# Altium PCB JUNORPCDC.PcbDoc (part 2 of 4)
Units mil, origin at the board's own origin, x right, y up, seen from the top; angles counter-clockwise.
Board outline 12224.75 x 6712.94 mil, 12 copper layers (Top Layer, Internal Plane 1, Signal Layer 1, Internal Plane 2, Internal Plane 3, Signal Layer 2, Internal Plane 4, Signal Layer 3, Internal Plane 5, Signal Layer 4, Internal Plane 6, Bottom Layer), stack 101.97 mil thick; 156 components, 400 nets, 1963 pads, 846 vias.
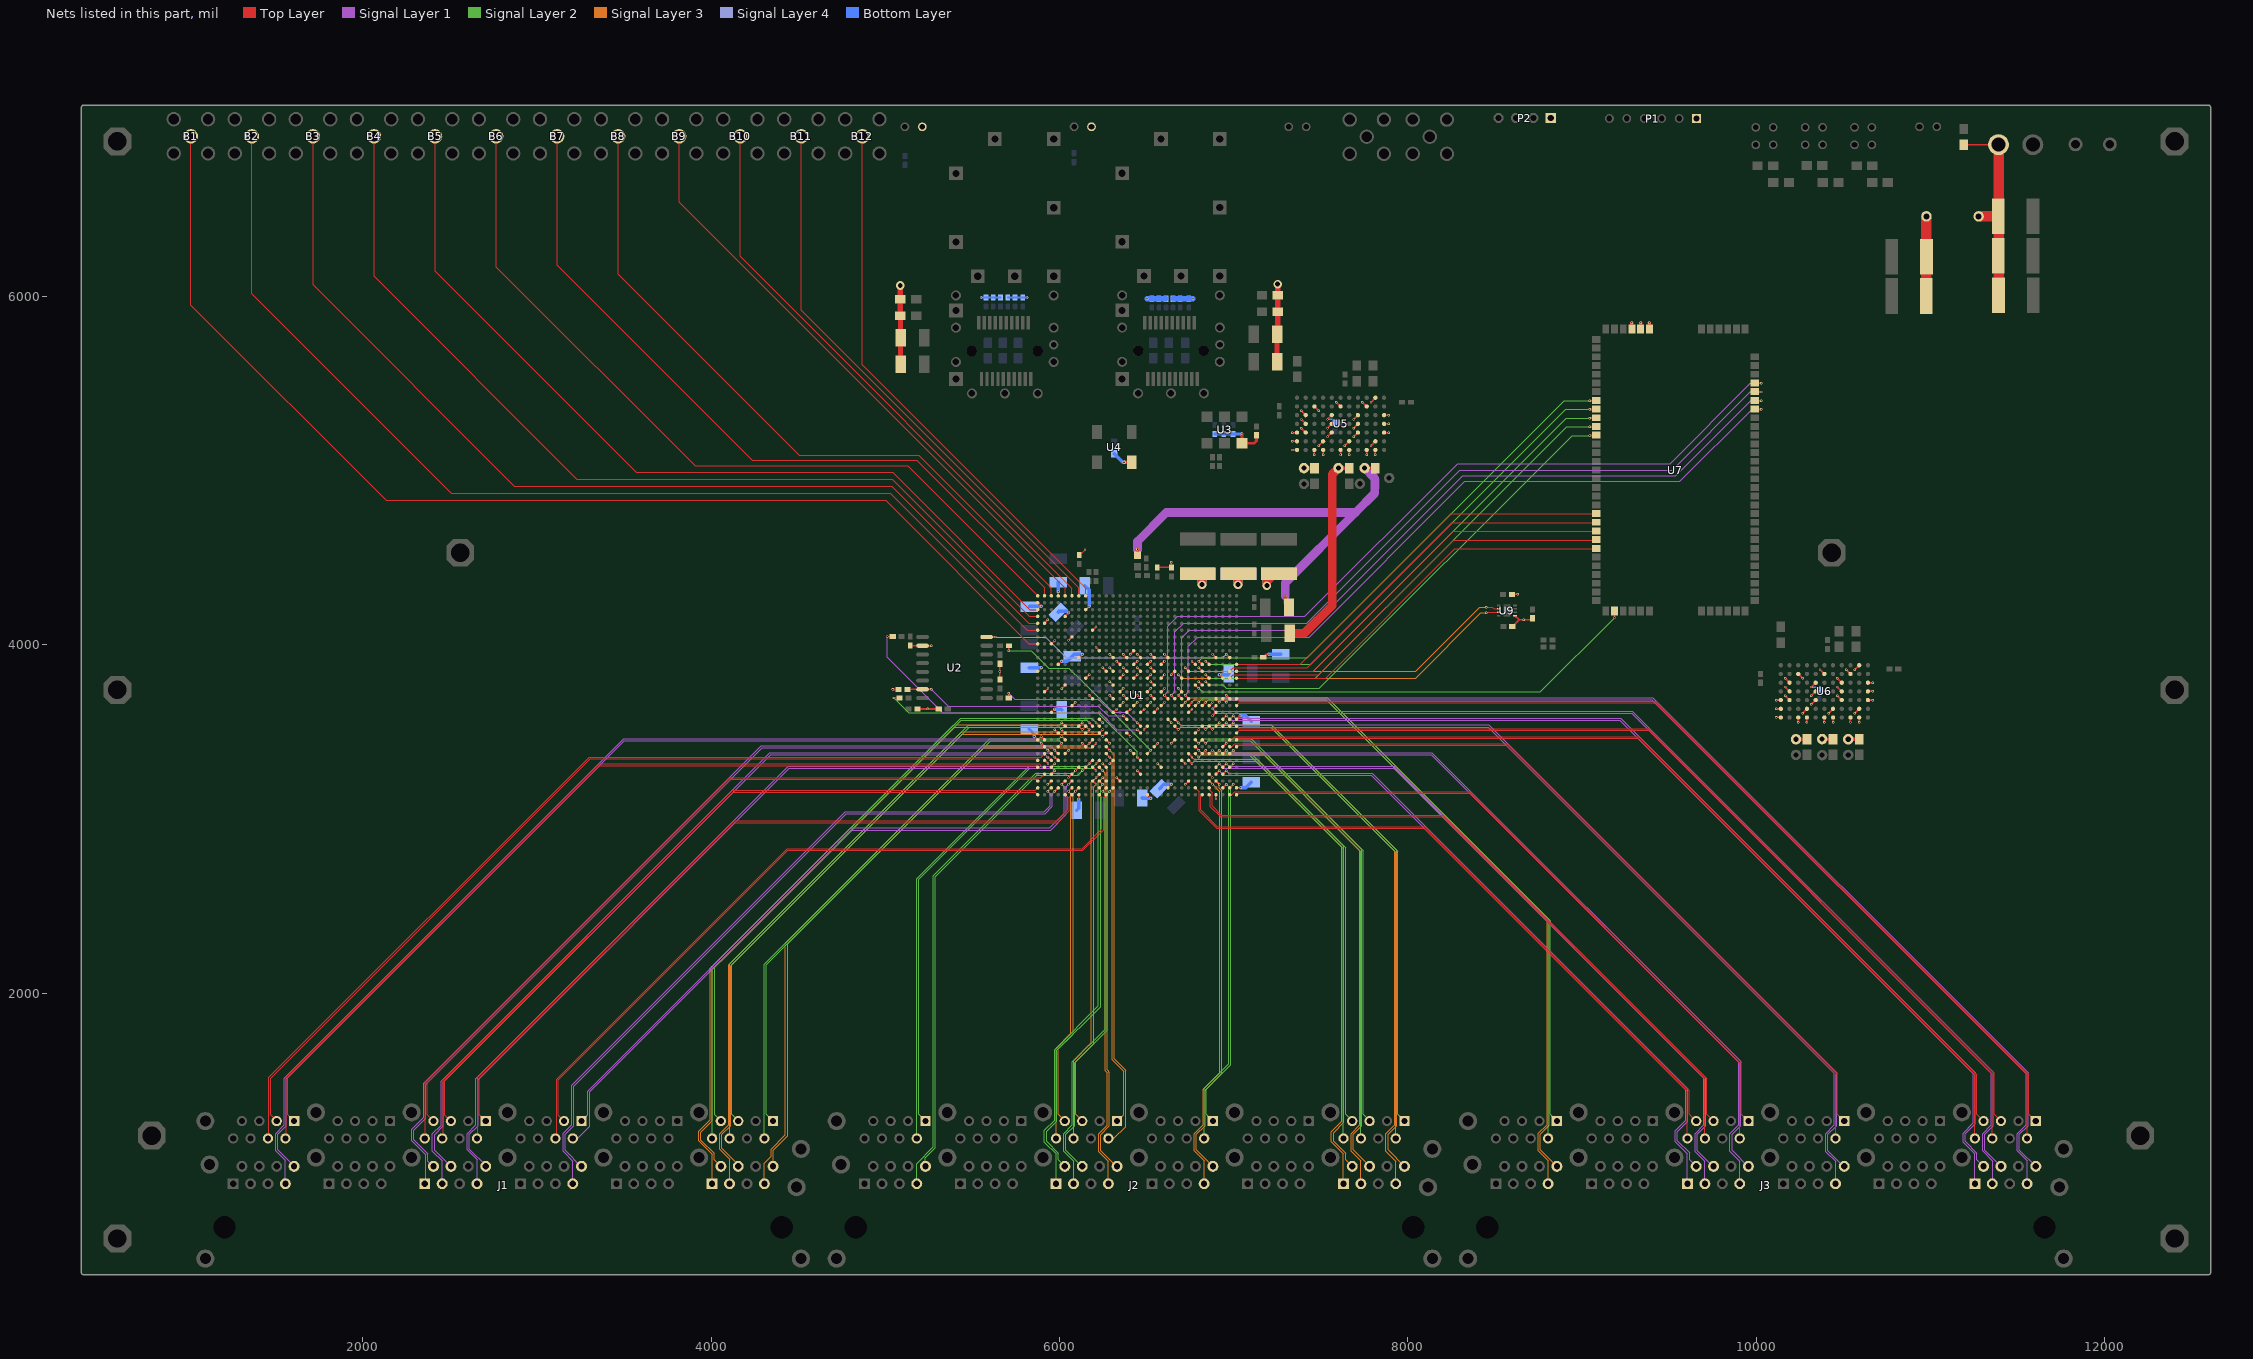
[diagram p12: the nets of this part, all layers, seen from the top]

## Via types
v1: diameter 14, hole 8, Top Layer to Bottom Layer, 811 vias
v2: diameter 50, hole 28, Top Layer to Bottom Layer, 26 vias
v3: diameter 20, hole 10, Top Layer to Bottom Layer, 9 vias

## Nets (pads, with @x,y where several pads share a name; then routed paths per layer and width w, separated by ;. In a path a pad name is that pad's centre, name@x,y a point inside that pad or via, vN(x,y) a via of type N, cw(c..) or ccw(c..) an arc to the next point about the centre after c; other vN are vias at no path point)
+1.0Vfpga: C21.2 C22.2 C23.2 C24.2 C25.2 C26.2 C49.2 pad.4 U1.M11 U1.M13 U1.M15 U1.M17 U1.N10 U1.N12 U1.N14 U1.N16 U1.N18 U1.P11 U1.P17 U1.R10 U1.R12 U1.R16 U1.R18 U1.T11 U1.T17 U1.U10 U1.U12 U1.U16 U1.U18 U1.V17 U1.W16 U1.W18 U5.A1 U5.A2 U5.A3 U5.C1 U5.D1 U5.D2 | length 1393.5
  Top Layer w8: v1(6287.6,3710) 6307.27,3690.33 U1.W16@6307.27,3689.93 ; U1.W18@6307.27,3611.19 6307.71,3611.19 v1(6327,3630.48) ; U1.V17@6346.64,3650.56 6366,3669.92 v1(6366,3670) ; v1(6366,3709) 6366.94,3709 U1.U16@6386.01,3689.93 ; v1(6366,3867) 6385.59,3847.41 U1.U12@6386.01,3847.41 ; v1(6366,3946) 6366.16,3946 U1.U10@6386.01,3926.15 ; U1.U18@6386.01,3611.19 6386.71,3611.19 v1(6406,3630.48) ; U1.T17@6425.38,3650.56 6425.76,3650.56 v1(6445.2,3670) ; U1.T11@6425.38,3886.78 6425.98,3886.78 v1(6445.2,3906) ; v1(6445,3867) 6445.16,3867 U1.R12@6464.75,3847.41 ; v1(6445.24,3709) 6445.68,3709 U1.R16@6464.75,3689.93 ; v1(6445.41,3946) 6464.75,3926.66 U1.R10@6464.75,3926.15 ; U1.R18@6464.75,3611.19 6465.71,3611.19 v1(6485,3630.48) ; U1.P17@6504.12,3650.56 6504.43,3650.56 v1(6523.87,3670) ; U1.P11@6504.12,3886.78 6504.78,3886.78 v1(6524,3906) ; v1(6523.87,3788) 6543.2,3768.67 U1.N14@6543.49,3768.67 U1.N14@6543.67,3768.67 ; v1(6523.87,3867) U1.N12@6543.49,3847.41 ; v1(6524.09,3709) 6524.42,3709 U1.N16@6543.49,3689.93 ; v1(6524.35,3945) 6524.64,3945 U1.N10@6543.49,3926.15 ; U1.N18@6543.49,3611.19 6543.49,3611.49 v1(6563,3631) ; U1.M17@6582.86,3650.56 6583.02,3650.56 v1(6602.46,3670) ; U1.M15@6582.86,3729.3 6602.46,3748.9 v1(6602.46,3749) ; U1.M13@6582.86,3808.04 6602,3827.18 v1(6602,3828) ; U1.M11@6582.86,3886.78 6602,3905.92 v1(6602,3906) ; v1(7336,5118) U5.A1@7363,5118 ; v1(7336,5168) U5.A2@7363,5168 ; v1(7336,5218) U5.A3@7363,5218 ; v1(7463,5091) U5.C1@7463,5118 ; v1(7488,5143) U5.D2@7513,5168 ; v1(7513,5091) U5.D1@7513,5118
  Top Layer w20: pad.4@7403,5014 C49.2@7464,5014
  Top Layer w50: C21.2@6794,4407.59 6817,4384.59 v2(6817,4345) ; v2(7024.22,4345) 7024.22,4403.81 C22.2@7027,4406.59 ; v2(7190,4339) 7190,4363 7233.59,4406.59 C23.2@7260,4406.59
  Bottom Layer w50: C26.2@6794,4407.59 6817,4384.59 v2(6817,4345) ; v2(7024.22,4345) 7024.22,4403.81 C25.2@7027,4406.59 ; v2(7190,4339) 7190,4366 7230.59,4406.59 C24.2@7260,4406.59
+1.0Vmgt: C55.2 L4.1 pad.6 U5.F1 U5.G1 U5.G2 | length 1264.4
  Top Layer w8: v1(7613,5091) U5.F1@7613,5118 ; v1(7638,5143) U5.G2@7663,5168 ; v1(7663,5091) U5.G1@7663,5118
  Top Layer w20: pad.6@7601,5014 C55.2@7663,5014
  Top Layer w50: L4.1@7322,4065.41 7405.41,4065.41 7565,4225 7565,4978 pad.6@7601,5014
+1.2Vmgt: C59.2 L1.2 L7.1 pad.8 U5.J1 U5.K1 U5.K2 | length 2596.2
  Top Layer w8: v1(7763,5091) U5.J1@7763,5118 ; v1(7788,5143) U5.K2@7813,5168 ; v1(7813,5091) U5.K1@7813,5118
  Top Layer w20: L1.2@6447,4513.46 v1(6447,4547) ; v1(7296,4279.55) 7296,4236.52 L7.1@7317,4215.52 ; pad.8@7751,5014 C59.2@7813,5014
  Signal Layer 1 w50: v1(6447,4547) 6447,4593 6613,4759 7699,4759 ; v1(7296,4279.55) 7296,4356 7699,4759 ; pad.8@7751,5014 7810,4955 7810,4870 7699,4759
+1.8Vd: C27.2 C28.2 C29.2 C30.2 C31.2 C32.2 C56.2 L5.1 pad.12 U1.AA9 U1.AA19 U1.AB16 U1.AC3 U1.AC13 U1.AD10 U1.AE7 U1.AE17 U1.AF4 U1.AF14 U1.AG1 U1.AG11 U1.AH8 U1.AH18 U1.AJ5 U1.AJ15 U1.AK2 U1.AK12 U1.P13 U1.P15 U1.T13 U1.V11 U1.V13 U1.V15 U1.W10 U1.W12 U1.W14 U1.Y12 U6.F1 U6.G1 U6.G2 | length 1490.9
  Top Layer w8: U1.AK12@5874.2,3847.41 5874.2,3847.6 v1(5893.6,3867) ; U1.AK2@5874.2,4241.11 5893.6,4221.71 v1(5893.6,4221) ; U1.AJ15@5913.57,3729.3 5913.75,3729.3 v1(5933.45,3749) ; U1.AJ5@5913.57,4123 5933,4142.43 v1(5933,4143) ; U1.AH18@5952.94,3611.19 5952.94,3611.42 v1(5972,3630.48) ; U1.AH8@5952.94,4004.89 5953.34,4004.89 v1(5972.45,4024) ; U1.AG11@5992.31,3886.78 6011.53,3906 v1(6011.69,3906) ; U1.AG1@5992.31,4280.48 v1(5992.31,4305) ; v1(6011.53,3748) 6031.68,3768.15 U1.AF14@6031.68,3768.67 U1.AF14@6032.31,3768.67 ; U1.AF4@6031.68,4162.37 6051,4181.69 v1(6051,4182) ; v1(6051,4025) 6051.79,4025 U1.AE7@6071.05,4044.26 ; U1.AE17@6071.05,3650.56 6071.31,3650.56 v1(6090.76,3670) ; U1.AD10@6110.42,3926.15 6111.54,3926.15 v1(6130.39,3945) ; U1.AC13@6149.79,3808.04 6169.61,3827.86 v1(6169.61,3828) ; U1.AC3@6149.79,4201.74 v1(6169,4221) ; v1(6169,3710) 6169.09,3710 U1.AB16@6189.16,3689.93 ; v1(6209,3985) U1.AA9@6228.53,3965.52 ; U1.AA19@6228.53,3571.82 6248,3552.35 v1(6248,3551.74) ; v1(6248.39,3867) 6267.9,3847.49 U1.Y12@6267.9,3847.41 ; v1(6287.41,3867) 6287.68,3867 U1.W12@6307.27,3847.41 ; v1(6287.6,3788) 6287.94,3788 U1.W14@6307.27,3768.67 U1.W14@6307.67,3768.67 ; v1(6287.78,3946) 6287.78,3945.64 U1.W10@6307.27,3926.15 ; v1(6327,3906) 6327.42,3906 U1.V11@6346.64,3886.78 ; U1.V15@6346.64,3729.3 6346.64,3729.64 v1(6366,3749) ; U1.V13@6346.64,3808.04 6346.64,3808.64 v1(6366,3828) ; U1.T13@6425.38,3808.04 6445,3827.66 v1(6445,3828) ; U1.P13@6504.12,3808.04 6524,3827.92 v1(6524,3828) ; U1.P15@6504.17,3729.3 v1(6523.87,3749) ; v1(10391,3555) U6.F1@10391,3582 ; v1(10416,3607) U6.G2@10441,3632 ; v1(10441,3555) U6.G1@10441,3582
  Top Layer w20: pad.12@10378,3458 10379,3457 C56.2@10441,3457
  Bottom Layer w20: C31.2@5826,3868 5827,3867 v1(5893.6,3867) ; C28.2@5826,4219 5828,4221 v1(5893.6,4221) ; v1(5972,3630.48) 6009.52,3630.48 C29.2@6013,3627 ; C32.2@5992,4187 5996,4191 6042,4191 v1(6051,4182) ; C27.2@5992,4359 5992.31,4358.69 v1(5992.31,4305) ; v1(6011.69,3906) 6045,3906 C30.2@6073,3934 6084,3945 v1(6130.39,3945) ; L5.1@6145,4339 6169,4315 v1(6169,4221)
+2.5Vd: C2.2 C3.2 C4.2 C37.2 C38.2 C39.2 C40.2 C60.2 pad.14 R16.2 U1.A19 U1.A29 U1.AA29 U1.AB26 U1.AC23 U1.AD20 U1.AD30 U1.AE27 U1.AF24 U1.AG21 U1.AH28 U1.AJ25 U1.AK22 U1.B16 U1.B26 U1.C23 U1.D20 U1.D30 U1.E17 U1.E27 U1.F24 U1.G21 U1.H18 U1.H28 U1.L19 U1.Y22 U3.6 U6.J1 U6.K1 U6.K2 | length 1476.4
  Top Layer w8: v1@5855,3472.91 U1.AK22@5874.2,3453.71 ; U1.AJ25@5913.57,3335.6 v1(5933.45,3315.72) ; v1@5933.45,3198 U1.AH28@5952.94,3217.49 ; v1(5972,3512) 5990.92,3493.08 U1.AG21@5992.31,3493.08 ; v1@6051.06,3236.87 U1.AE27@6071.05,3256.86 ; v1(6110.42,3114) U1.AD30@6110.42,3138.75 ; U1.AD20@6110.42,3532.45 6110.47,3532.45 v1(6130,3551.98) ; v1(6130,3434) U1.AC23@6149.66,3414.34 ; U1.AB26@6189.16,3296.23 v1@6209,3276.39 ; v1(6209,3157.76) U1.AA29@6228.53,3177.28 ; U1.Y22@6267.9,3453.71 v1@6287.15,3434.46 ; U1.L19@6622.23,3571.82 6622.23,3571.51 v1(6642,3551.74) ; v1(6721,3197.93) U1.H28@6740.34,3217.27 ; U1.H18@6740.34,3611.19 6759.63,3630.48 v1(6760,3630.48) ; U1.G21@6779.71,3493.08 6799,3512.37 v1(6799,3513) ; U1.F24@6819.97,3374.97 v1(6839,3394) ; U1.E17@6858.45,3650.56 6877.89,3670 v1(6878,3670) ; v1(6897.82,3114) U1.D30@6897.82,3138.75 ; U1.D20@6897.82,3532.45 6897.82,3532.82 v1(6917,3552) ; U1.C23@6937.34,3414.34 v1(6957,3434) ; v1(6956.74,3710) 6956.74,3709.75 U1.B16@6976.56,3689.93 ; U1.B26@6976.56,3296.23 v1@6996.26,3315.93 ; U1.A29@7015.93,3178.12 v1(7040,3178.12) ; U1.A19@7015.93,3571.82 7015.93,3571.93 v1(7036,3592) ; v1(10541,3555) U6.J1@10541,3582 ; v1(10566,3607) U6.K2@10591,3632 ; v1(10591,3555) U6.K1@10591,3582
  Top Layer w10: v1@5855,3472.91 v1(5855,3473) ; v1(5933,3198) v1@5933.45,3198 ; U1.AF24@6031.68,3374.97 6051.56,3394.85 v1(6051.56,3395) ; v1(6051,3236.87) v1@6051.06,3236.87 ; U1.AC23@6149.66,3414.34 U1.AC23@6149.79,3414.34 ; v1(6209,3276) v1@6209,3276.39 ; U1.AA29@6228.53,3177.28 U1.AA29@6228.53,3178.12 ; v1(6287.15,3433.52) v1@6287.15,3434.46 ; U1.H28@6740.34,3217.27 U1.H28@6740.34,3217.49 ; U1.F24@6819.08,3374.97 U1.F24@6819.97,3374.97 ; U1.E27@6858.45,3256.86 6878,3237.31 v1(6878,3236.5) ; U1.C23@6937.19,3414.34 U1.C23@6937.34,3414.34 ; v1@6996.26,3315.93 v1(6996.26,3316)
  Top Layer w16: v1(7047,5210.41) U3.6@7047,5156 7116,5156 7131,5171 R16.2@7131,5202.41
  Top Layer w20: pad.14@10528,3457 C60.2@10591,3457
  Bottom Layer w16: C2.2@6891,5210.41 C3.2@6943,5210.41 C4.2@6996,5210.41 v1(7047,5210.41)
  Bottom Layer w20: C38.2@5826,3514 5855,3485 v1(5855,3473) ; C37.2@6099,3049 6110.42,3060.42 v1(6110.42,3114) ; v1(7036,3592) 7069,3592 C39.2@7100,3561 ; v1(7040,3178.12) 7068.12,3178.12 C40.2@7101,3211
+3.3Vd: C1.2 C9.2 C11.2 C16.2 C19.2 C33.2 C34.2 C35.2 C36.2 C41.2 C50.2 C70.1 L2.2 L3.1 L6.2 L8.1 LED2.1 LED3.1 P1.1 P2.1 pad.10 R1.2 R2.2 R3.2 R6.2 R7.2 R8.2 R9.2 R10.2 R11.2 R22.1 R23.1 R24.1 R25.1 R26.1 R27.1 R29.1 R30.1 R31.1 R32.1 R33.1 R34.1 R56.1 R57.1 U1.AB6 U1.C13 U1.D10 U1.F14 U1.G11 U1.J15 U1.J25 U1.K12 U1.K22 U1.L10 U1.L29 U1.M26 U1.N23 U1.P20 U1.P30 U1.R27 U1.T9 U1.T24 U1.U21 U1.V28 U1.W25 U2.2 U4.4 U6.A1 U6.A2 U6.A3 U6.C1 U6.D1 U6.D2 U7.C8 U7.C9 U7.C10 U9.5 | length 3407.5
  Top Layer w8: R9.2@5143,3995.41 5144.41,3994 U2.2@5213.13,3994 v1(5264,3994) ; U1.AB6@6189.16,4083.63 6189.63,4083.63 v1(6209,4103) ; v1@6287.6,3315.93 U1.W25@6307.27,3335.6 ; v1(6327,3237) U1.V28@6346.51,3217.49 ; U1.U21@6386.01,3493.08 6406,3473.09 v1(6406,3472.91) ; v1(6406,3946) 6425.38,3965.38 U1.T9@6425.38,3965.52 ; v1@6406.35,3394 U1.T24@6425.38,3374.97 ; v1@6445.61,3276 U1.R27@6464.75,3256.86 ; v1(6484.57,3512.26) 6504.12,3531.81 U1.P20@6504.12,3532.45 ; U1.P30@6504.12,3138.75 v1@6523.87,3119 ; U1.N23@6543.49,3414.34 v1@6563,3433.85 ; R3.2@6561.14,4443.59 R1.2@6642,4443.59 v1(6642,4474) ; v1(6563,3316) U1.M26@6582.77,3296.23 ; v1(6602,3946) 6602.38,3946 U1.L10@6622.23,3926.15 ; v1(6642,3433.85) U1.K22@6661.6,3453.45 ; v1(6642,3828) 6661.41,3847.41 U1.K12@6661.6,3847.41 ; v1(6681.2,3749) 6681.27,3749 U1.J15@6700.97,3729.3 ; U1.J25@6700.97,3335.6 v1@6721,3315.57 ; v1(6760,3906) 6779.22,3886.78 U1.G11@6779.71,3886.78 ; v1(6799,3788) 6799.75,3788 U1.F14@6819.08,3768.67 ; v1(6878,3946) U1.D10@6897.82,3926.15 ; v1(6918,3828) 6937.19,3808.81 U1.C13@6937.19,3808.04 ; R2.2@7169.59,3928 7187.56,3945.97 v1(7202,3945.97) ; R57.1@8597.59,4289 v1(8630,4289) ; R56.1@8599,4104 8637.73,4142.73 8637.73,4143 ; U9.5@8614.26,4166.47 8637.73,4143 ; C70.1@8715,4151.41 8706.59,4143 v1(8666,4143) 8637.73,4143 ; v1(10114,3582.16) 10114.16,3582 U6.A1@10141,3582 ; v1(10114,3632) U6.A2@10141,3632 ; v1(10114,3682) U6.A3@10141,3682 ; v1(10241,3555) U6.C1@10241,3582 ; v1(10266,3607) U6.D2@10291,3632 ; v1(10291,3555) U6.D1@10291,3582
  Top Layer w10: v1(5043,3743) R8.2@5075.41,3743 ; R7.2@5183.59,3631 v1(5242,3631) 5306.23,3631 C1.2@5306.41,3631.18 ; R11.2@5657,3800.59 v1(5657,3846) R10.2@5657,3890.82 ; R6.2@6113,4515.18 6117.18,4515.18 v1(6146,4544) ; v1(6287.41,3315.93) v1@6287.6,3315.93 ; U1.V28@6346.51,3217.49 U1.V28@6346.64,3217.49 ; v1(6406,3394) v1@6406.35,3394 ; v1(6445,3276) v1@6445.61,3276 ; v1@6523.87,3119 v1(6524,3119) ; v1@6563,3433.85 v1(6563,3434) ; U1.M26@6582.77,3296.23 U1.M26@6582.86,3296.23 ; U1.L29@6621.88,3178.12 U1.L29@6622.23,3178.12 v1(6642,3197.93) ; U1.K22@6661.6,3453.45 U1.K22@6661.6,3453.71 ; v1(6721,3315.24) v1@6721,3315.57
  Top Layer w20: v3(6370,5048) 6370.23,5047.77 U4.4@6415,5047.77 ; U7.C10@9286,5812.65 v1(9286,5848) ; U7.C9@9336,5812.65 v1(9336,5848) ; U7.C8@9386,5812.65 v1(9386,5848) ; pad.10@10228,3457 C50.2@10291,3457
  Top Layer w30: v2(5085,6062) 5085,5889 C16.2@5086,5888 5087,5887 L8.1@5087,5762 L6.2@5087,5609 ; L2.2@7249,5625 L3.1@7249,5782 7252,5785 C11.2@7252,5911 C9.2@7252,6007 v2(7252,6070)
  Bottom Layer w10: v1(5549,5993.59) R29.1@5578,5993.59 R34.1@5619.5,5993.59 R33.1@5661,5993.59 ; R32.1@5702.5,5993.59 R31.1@5744,5993.59 R30.1@5788,5993.59 v1(5813,5993.59)
  Bottom Layer w20: C41.2@6314,5096.54 6362.54,5048 v3(6370,5048) ; C36.2@6475,3120 6476,3119 v1(6524,3119) ; C34.2@6573.54,3173.46 6598.01,3197.93 v1(6642,3197.93) ; v1(6918,3828) 6966,3828 C35.2@6970,3832 ; v1(7202,3945.97) 7268.03,3945.97 C33.2@7269,3945
  Bottom Layer w30: v1(6502,5986.59) R22.1@6529,5986.59 R27.1@6569.8,5986.59 R26.1@6610.6,5986.59 ; R25.1@6651.4,5986.59 R24.1@6692.2,5986.59 R23.1@6742,5986.59 v1(6766,5986.59)
+12V: C47.2 C48.2 L9.2 R42.1 R43.1 U5.B3 U5.B4 U5.B5 U5.C6 U5.E3 U5.E4 U5.E5 U5.F6 U5.H3 U5.H4 U5.H5 U5.J6 U5.K7 U5.L3 U5.L4 U5.L5 U6.B3 U6.B4 U6.B5 U6.C6 U6.E3 U6.E4 U6.E5 U6.F6 U6.H3 U6.H4 U6.H5 U6.J6 U6.K7 U6.L3 U6.L4 U6.L5 | length 1640.7
  Top Layer w8: v1(7388,5243) U5.B3@7413,5218 ; v1(7388,5293) U5.B4@7413,5268 ; v1(7388,5343) U5.B5@7413,5318 ; U5.C6@7463,5368 v1(7488,5343) ; v1(7538,5193) U5.E3@7563,5218 ; v1(7538,5243) U5.E4@7563,5268 ; v1(7538,5293) U5.E5@7563,5318 ; v1(7588,5393) U5.F6@7613,5368 ; v1(7688,5193) U5.H3@7713,5218 ; v1(7688,5243) U5.H4@7713,5268 ; v1(7688,5293) U5.H5@7713,5318 ; v1(7738,5393) U5.J6@7763,5368 ; v1(7788,5393) U5.K7@7813,5418 ; U5.L3@7863,5218 v1(7890,5218) ; U5.L4@7863,5268 v1(7890,5268) ; U5.L5@7863,5318 v1(7890,5318) ; v1(10166,3707) U6.B3@10191,3682 ; v1(10166,3757) U6.B4@10191,3732 ; v1(10166,3807) U6.B5@10191,3782 ; U6.C6@10241,3832 v1(10266,3807) ; v1(10316,3657) U6.E3@10341,3682 ; v1(10316,3707) U6.E4@10341,3732 ; v1(10316,3757) U6.E5@10341,3782 ; v1(10366,3857) U6.F6@10391,3832 ; v1(10466,3707) U6.H3@10491,3682 ; v1(10466,3757) U6.H4@10491,3732 ; v1(10466,3807) U6.H5@10491,3782 ; v1(10516,3857) U6.J6@10541,3832 ; v1(10566,3857) U6.K7@10591,3882 ; U6.L3@10641,3682 v1(10668,3682) ; U6.L4@10641,3732 v1(10668,3732) ; U6.L5@10641,3782 v1(10668,3782)
  Top Layer w60: C48.2@10976.41,6002 10977,6002.59 L9.2@10977,6459
  Bottom Layer w8: v1(7538,5293) 7564.59,5293 R42.1@7581,5276.59 ; v1(10316,3757) 10346.59,3757 R43.1@10362,3741.59
+12Vin: C44.2 C45.2 C46.2 L9.1 pad.3 R54.1 | length 1178.2
  Top Layer w10: R54.1@11192,6871 pad.3@11391,6871
  Top Layer w60: L9.1@11277,6459 C44.2@11389.59,6459 C44.2@11391,6459 ; C46.2@11390.59,6006 11391,6006.41 C44.2@11391,6459 ; pad.3@11391,6871 C44.2@11391,6459
ADDR_LVCMOS33: U1.H12 U9.2 | length 1992.6
  Top Layer w4: v1(8449,4214.67) 8485.33,4214.67 8494.16,4205.84 U9.2@8521.74,4205.84
  Top Layer w8: v1(6721,3867) 6740.34,3847.66 U1.H12@6740.34,3847.41
  Signal Layer 3 w4: v1(6721,3867) 6741,3847 8045,3847 8412.67,4214.67 v1(8449,4214.67)
ALERT_LVCMOS33: U1.J13 U9.3 | length 2033.9
  Top Layer w4: v1(8449,4183.33) 8451.82,4186.16 U9.3@8521.74,4186.16
  Top Layer w8: v1(6681,3828) U1.J13@6700.97,3808.04
  Signal Layer 3 w4: v1(6681,3828) 6701,3808 8044,3808 8419.33,4183.33 v1(8449,4183.33)
cal1_LVCMOS18: B1.1 U1.AK8 | length 6637.3
  Top Layer w4: B1.1@1012.43,6919 1012.43,5948.57 2133,4828 5001,4828 5824.11,4004.89 U1.AK8@5874.2,4004.89
cal2_LVCMOS18: B2.1 U1.AK6 | length 6215.8
  Top Layer w4: B2.1@1362.88,6919 1362.88,6014.12 2507,4870 5027,4870 5813.37,4083.63 U1.AK6@5874.2,4083.63
cal3_LVCMOS18: B3.1 U1.AK5 | length 5818.3
  Top Layer w4: B3.1@1713.33,6919 1713.33,6066.67 2869,4911 5035.35,4911 5823.35,4123 U1.AK5@5874.2,4123
cal4_LVCMOS18: B4.1 U1.AK4 | length 5423.7
  Top Layer w4: B4.1@2063.79,6919 2063.79,6114.21 3229,4949 5040,4949 5826.63,4162.37 U1.AK4@5874.2,4162.37
cal5_LVCMOS18: B5.1 U1.AK3 | length 5039
  Top Layer w4: B5.1@2414.24,6919 2414.24,6144.76 3570,4989 5041,4989 5828.26,4201.74 U1.AK3@5874.2,4201.74
cal6_LVCMOS18: B6.1 U1.AK1 | length 4642.2
  Top Layer w4: B6.1@2764.7,6919 2764.7,6168.3 3907,5026 5128.68,5026 U1.AK1@5874.2,4280.48
cal7_LVCMOS18: B7.1 U1.AJ1 | length 4351.8
  Top Layer w4: B7.1@3115.15,6919 3115.15,6178.85 4235,5059 5181,5059 5913.57,4326.43 U1.AJ1@5913.57,4280.48
cal8_LVCMOS18: B8.1 U1.AH1 | length 4070.7
  Top Layer w4: B8.1@3465.61,6919 3465.61,6127.39 4505,5088 5191,5088 5952.94,4326.06 U1.AH1@5952.94,4280.48
cal9_LVCMOS18: B9.1 U1.AF1 | length 3556.3
  Top Layer w4: B9.1@3816.06,6919 3816.06,6540.94 6031.68,4325.32 U1.AF1@6031.68,4280.48
cal10_LVCMOS18: B10.1 U1.AE1 | length 3427.4
  Top Layer w4: B10.1@4166.52,6919 4166.52,6229.48 6071.05,4324.95 U1.AE1@6071.05,4280.48
cal11_LVCMOS18: B11.1 U1.AD1 | length 3298.5
  Top Layer w4: B11.1@4516.97,6919 4516.97,5919.44 6110.42,4325.99 U1.AD1@6110.42,4280.48
cal12_LVCMOS18: B12.1 U1.AC1 | length 3169.7
  Top Layer w4: B12.1@4867.42,6919 4867.42,5607.58 6149.79,4325.21 U1.AC1@6149.79,4280.48
CLK1_LVDS25_N: J1.C2 U1.AF30 | length 4469
  Top Layer w4: J1.C2@2655,1165 2659,1169 2659,1515.14 4132.86,2989 5984,2989 6046.36,3051.36 6046.36,3124.06 U1.AF30@6031.68,3138.75
CLK1_LVDS25_P: J1.C1 U1.AE30 | length 4382.2
  Top Layer w4: J1.C1@2705,1265 2669,1301 2669,1511 4137,2979 5988.14,2979 6056.36,3047.22 6056.36,3124.06 U1.AE30@6071.05,3138.75
CLK2_LVDS25_N: J1.F2 U1.AF22 | length 3277
  Top Layer w8: v1@6012.39,3473 U1.AF22@6031.68,3453.71
  Top Layer w10: v1(6012,3473) v1@6012.39,3473
  Signal Layer 2 w4: J1.F2@4305,1165 4305,2165.97 5598.53,3459.5 5998.5,3459.5 v1(6012,3473)
CLK2_LVDS25_P: J1.F1 U1.AG23 | length 3173.1
  Top Layer w8: U1.AG23@5992.31,3414.34 v1(6012,3434)
  Signal Layer 2 w4: J1.F1@4355,1265 4317,1303 4317,2161 5603.5,3447.5 5998.5,3447.5 v1(6012,3434)
CLK3_LVDS25_N: J1.I7 U1.AH26 | length 4746.6
  Top Layer w8: U1.AH26@5952.94,3296.23 v1@5972,3315.29
  Top Layer w10: U1.AH26@5952.77,3296.23 U1.AH26@5952.94,3296.23 ; v1@5972,3315.29 v1(5972,3316)
  Signal Layer 1 w4: J1.I7@2655,905 2655,1043.03 2599,1099.03 2599,1193 2649,1243 2649,1507.97 4443.03,3302 5958,3302 v1(5972,3316)
CLK3_LVDS25_P: J1.I8 U1.AH27 | length 4641.7
  Top Layer w8: U1.AH27@5952.94,3256.86 v1@5972,3275.92
  Top Layer w10: v1@5972,3275.92 v1(5972,3276)
  Signal Layer 1 w4: J1.I8@2705,1005 2705,1010 2611,1104 2611,1188.03 2661,1238.03 2661,1503 4448,3290 5958,3290 v1(5972,3276)
CLK4_LVDS25_N: J1.L7 U1.AB22 | length 3678.5
  Top Layer w8: v1@6169.45,3434 U1.AB22@6189.16,3453.71
  Top Layer w10: v1(6169,3434) v1@6169.45,3434
  Signal Layer 3 w4: J1.L7@4305,905 4305,1024 4343,1062 4343,1103 4426,1186 4426,2286.97 5560.03,3421 6156,3421 v1(6169,3434)
CLK4_LVDS25_P: J1.L8 U1.AB23 | length 3590.4
  Top Layer w8: U1.AB23@6189.34,3414.34 v1(6209,3434)
  Top Layer w10: U1.AB23@6189.16,3414.34 U1.AB23@6189.34,3414.34
  Signal Layer 1 w4: J1.L8@4353,1007 J1.L8@4355,1005
  Signal Layer 3 w4: J1.L8@4355,1005 4355,1098.03 4438,1181.03 4438,2282 5565,3409 6184,3409 v1(6209,3434)
CLK5_LVDS25_N: J2.C2 U1.Y23 | length 2354.5
  Top Layer w8: U1.Y23@6267.9,3414.34 v1@6287,3395.24
  Top Layer w10: v1(6287,3394) v1@6287,3395.24
  Signal Layer 3 w4: J2.C2@6280,1165 6311,1165 6379,1233 6379,1556 6313,1622 6313,3368 v1(6287,3394)
CLK5_LVDS25_P: J2.C1 U1.Y24 | length 2166.3
  Top Layer w8: U1.Y24@6267.9,3374.1 v1(6287,3355)
  Top Layer w10: U1.Y24@6267.9,3374.1 U1.Y24@6267.9,3374.97
  Signal Layer 3 w4: v1(6287,3355) 6301,3341 6301,1617.03 6367,1551.03 6367,1302 J2.C1@6330,1265
CLK6_LVDS25_N: J2.F2 U1.E20 | length 3026.2
  Top Layer w8: U1.E20@6858.45,3532.45 6858.55,3532.45 v1(6878,3513)
  Signal Layer 2 w4: v1(6878,3513) 6892,3527 7211,3527 7930,2808 J2.F2@7930,1165
CLK6_LVDS25_P: J2.F1 U1.F20 | length 3006.2
  Top Layer w8: U1.F20@6819.08,3532.45 6838.53,3513 v1(6839,3513)
  Signal Layer 2 w4: v1(6839,3513) 6865,3539 7215.97,3539 7942,2812.97 7942,1303 J2.F1@7980,1265
CLK7_LVDS25_N: J2.I7 U1.AA26 | length 2454
  Top Layer w8: U1.AA26@6228.53,3296.23 v1@6248,3276.76
  Top Layer w10: v1(6248,3276) v1@6248,3276.76
  Signal Layer 3 w4: v1(6248,3276) 6261.5,3262.5 6261.5,1553.53 6274,1541.03 6274,1242 6224,1192 6224,1090.03 6280,1034.03 J2.I7@6280,905
CLK7_LVDS25_P: J2.I8 U1.Y26 | length 2416.8
  Top Layer w8: v1(6248,3316) U1.Y26@6267.77,3296.23
  Top Layer w10: U1.Y26@6267.77,3296.23 U1.Y26@6267.9,3296.23
  Signal Layer 3 w4: v1(6248,3316) 6273.5,3290.5 6273.5,1558.5 6286,1546 6286,1237.03 6236,1187.03 6236,1095 6326,1005 J2.I8@6330,1005
CLK8_LVDS25_N: J2.L7 U1.K20 | length 3524.1
  Top Layer w8: U1.K20@6661.6,3532.45 v1(6681,3513)
  Signal Layer 3 w4: v1(6681,3513) 6694.5,3526.5 7211.5,3526.5 7924,2814 7924,1243 7874,1193 7874,1091 7930,1035 J2.L7@7930,905
CLK8_LVDS25_P: J2.L8 U1.K19 | length 3460.1
  Top Layer w8: U1.K19@6661.6,3571.82 6661.6,3571.4 v1(6681,3552)
  Signal Layer 3 w4: v1(6681,3552) 6694.5,3538.5 7216.47,3538.5 7936,2818.97 7936,1238.03 7886,1188.03 7886,1099 J2.L8@7980,1005
CLK9_LVDS25_N: J3.C2 U1.A30 | length 3966.5
  Top Layer w4: U1.A30@7015.93,3138.75 7024.18,3147 8355,3147 9905,1597 J3.C2@9905,1165
CLK9_LVDS25_P: J3.C1 U1.B30 | length 3943.2
  Top Layer w4: U1.B30@6976.56,3138.75 6988.4,3138.75 7006.65,3157 8359.14,3157 9915,1601.14 9915,1305 J3.C1@9955,1265
CLK10_LVDS25_N: J3.F2 U1.A17 | length 5794.6
  Top Layer w4: U1.A17@7015.93,3650.56 7030.61,3665.24 9419.76,3665.24 11555,1530 J3.F2@11555,1165
CLK10_LVDS25_P: J3.F1 U1.A16 | length 5727.7
  Top Layer w4: U1.A16@7015.93,3689.93 7030.61,3675.24 9423.9,3675.24 11565,1534.14 11565,1305 J3.F1@11605,1265
CLK11_LVDS25_N: J3.I7 U1.C24 | length 4453.5
  Top Layer w8: U1.C24@6937.97,3374.97 v1(6957,3394)
  Top Layer w10: U1.C24@6937.19,3374.97 U1.C24@6937.97,3374.97
  Signal Layer 1 w4: v1(6957,3394) 6982,3369 8133,3369 9899,1603 9899,1243 9849,1193 9849,1091.03 9905,1035.03 J3.I7@9905,905
CLK11_LVDS25_P: J3.I8 U1.B24 | length 4346.5
  Top Layer w8: U1.B24@6976.97,3374.97 v1(6996,3394)
  Top Layer w10: U1.B24@6976.56,3374.97 U1.B24@6976.97,3374.97
  Signal Layer 1 w4: v1(6996,3394) 7009,3381 8137.97,3381 9911,1607.97 9911,1238.03 9861,1188.03 9861,1096 9952,1005 J3.I8@9955,1005
CLK12_LVDS25_N: J3.L7 U1.C16 | length 6190.6
  Top Layer w8: U1.C16@6937.19,3689.93 6957,3670.12 v1(6957,3670)
  Signal Layer 1 w4: v1(6957,3670) 6971,3684 9401,3684 11549,1536 11549,1243 11499,1193 11499,1093.03 11555,1037.03 J3.L7@11555,905
CLK12_LVDS25_P: J3.L8 U1.D16 | length 6171.5
  Top Layer w8: U1.D16@6897.82,3689.93 6917,3670.75 v1(6917,3670)
  Signal Layer 1 w4: v1(6917,3670) 6943,3696 9405.97,3696 11561,1540.97 11561,1238.03 11511,1188.03 11511,1098 11604,1005 J3.L8@11605,1005
CLK_VCXO_DMTD_LVCMOS33: U1.G14 U7.A3 | length 2638.3
  Top Layer w8: U1.G14@6779.71,3768.67 6779.71,3768.29 v1(6799,3749)
  Top Layer w10: v1(9186,4154) U7.A3@9186,4193.35
  Signal Layer 2 w4: v1(6799,3749) 6819,3729 8761,3729 v1(9186,4154)
DAC_DMTD_LDAC_N_LVCMOS33: U1.A11 U7.D11 | length 2422
  Top Layer w4: U1.A11@7015.93,3886.78 7382.78,3886.78 8247,4751 U7.D11@9080,4751
DAC_DMTD_SCLK_LVCMOS33: U1.B13 U7.D8 | length 2431.9
  Top Layer w4: U1.B13@6976.56,3808.04 6996.52,3828 7489,3828 8262,4601 U7.D8@9080,4601
DAC_DMTD_SDI_LVCMOS33: U1.A12 U7.D9 | length 2396.9
  Top Layer w4: U1.A12@7015.93,3847.41 7455.41,3847.41 8259,4651 U7.D9@9080,4651
DAC_DMTD_SDO_LVCMOS33: U1.B12 U7.D10 | length 2457
  Top Layer w4: U1.B12@6976.56,3847.41 6996.15,3867 7421,3867 8255,4701 U7.D10@9080,4701
DAC_DMTD_SYNC_N_LVCMOS33: U1.A13 U7.D7 | length 2371.8
  Top Layer w4: U1.A13@7015.93,3808.04 7527.04,3808.04 8270,4551 U7.D7@9080,4551
DAC_REF_LDAC_N_LVCMOS33: U1.F11 U7.D24 | length 2929.4
  Top Layer w8: v1(6799,3906) 6818.22,3886.78 U1.F11@6819.08,3886.78
  Top Layer w10: v1(9043,5401) 9078.29,5401 U7.D24@9080.29,5403
  Signal Layer 2 w4: v1(6799,3906) 6819,3926 7422,3926 8897,5401 v1(9043,5401)
DAC_REF_SCLK_LVCMOS33: U1.E13 U7.D21 | length 2876.1
  Top Layer w8: v1(6839,3828) 6858.45,3808.55 U1.E13@6858.45,3808.04
  Top Layer w10: v1(9043,5251) 9078.29,5251 U7.D21@9080.29,5253
  Signal Layer 2 w4: v1(6839,3828) 6859,3808 7469,3808 8912,5251 v1(9043,5251)
DAC_REF_SDI_LVCMOS33: U1.F12 U7.D22 | length 2920.9
  Top Layer w8: v1(6799,3867) 6818.59,3847.41 U1.F12@6819.08,3847.41
  Top Layer w10: v1(9043,5301) 9078.29,5301 U7.D22@9080.29,5303
  Signal Layer 2 w4: v1(6799,3867) 6819,3847 7455,3847 8909,5301 v1(9043,5301)
DAC_REF_SDO_LVCMOS33: U1.E11 U7.D23 | length 2883.8
  Top Layer w8: v1(6839,3906) 6839.23,3906 U1.E11@6858.45,3886.78
  Top Layer w10: v1(9043,5351) 9078.29,5351 U7.D23@9080.29,5353
  Signal Layer 2 w4: v1(6839,3906) 6858,3887 7441,3887 8905,5351 v1(9043,5351)
DAC_REF_SYNC_N_LVCMOS33: U1.E14 U7.D20 | length 2887.2
  Top Layer w8: v1(6839,3788) 6839.12,3788 U1.E14@6858.45,3768.67
  Top Layer w10: v1(9043,5201) 9078.29,5201 U7.D20@9080.29,5203
  Signal Layer 2 w4: v1(6839,3788) 6858.33,3768.67 6936.33,3768.67 6956,3749 7492,3749 8944,5201 v1(9043,5201)
DATA1_LVDS25_N: J1.C6 U1.AK29 | length 4447.6
  Top Layer w4: J1.C6@2455,1165 2461,1171 2461,1503.14 4121.29,3163.43 5859.51,3163.43 U1.AK29@5874.2,3178.12
DATA1_LVDS25_P: J1.C5 U1.AK30 | length 4342.7
  Top Layer w4: J1.C5@2505,1265 2471,1299 2471,1499 4125.43,3153.43 5859.51,3153.43 U1.AK30@5874.2,3138.75
DATA2_LVDS25_N: J1.F6 U1.AF20 | length 3510.4
  Top Layer w8: v1(6012,3552) 6012.13,3552 U1.AF20@6031.68,3532.45
  Signal Layer 2 w4: J1.F6@4105,1165 4105,2166.97 5476.53,3538.5 5998.5,3538.5 v1(6012,3552)
DATA2_LVDS25_P: J1.F5 U1.AF21 | length 3406.6
  Top Layer w8: v1(6012,3513) 6031.68,3493.32 U1.AF21@6031.68,3493.08
  Signal Layer 2 w4: J1.F5@4155,1265 4117,1303 4117,2162 5481.5,3526.5 5998.5,3526.5 v1(6012,3513)
DATA3_LVDS25_N: J1.I3 U1.AG25 | length 4976.6
  Top Layer w8: v1(5972,3355) U1.AG25@5991.4,3335.6
  Top Layer w10: U1.AG25@5991.4,3335.6 U1.AG25@5992.31,3335.6
  Signal Layer 1 w4: J1.I3@2455,905 2455,1036.03 2399,1092.03 2399,1192 2449,1242 2449,1493.97 4336.03,3381 5946,3381 v1(5972,3355)
DATA3_LVDS25_P: J1.I4 U1.AH25 | length 4829.3
  Top Layer w8: v1@5933.54,3355 U1.AH25@5952.94,3335.6
  Top Layer w10: v1(5933,3355) v1@5933.54,3355
  Signal Layer 1 w4: J1.I4@2505,1005 2503,1005 2411,1097 2411,1187.03 2461,1237.03 2461,1489 4341,3369 5919,3369 v1(5933,3355)
DATA4_LVDS25_N: J1.L3 U1.AA21 | length 4042.5
  Top Layer w8: U1.AA21@6228.53,3492.47 U1.AA21@6228.53,3493.08 6248,3512.55 v1(6248,3513)
  Signal Layer 1 w4: J1.L3@4105,905 J1.L3@4108.51,908.51
  Signal Layer 3 w4: J1.L3@4105,905 4105,1047.03 4049,1103.03 4049,1193 4099,1243 4099,2160.97 5437.03,3499 6234,3499 v1(6248,3513)
DATA4_LVDS25_P: J1.L4 U1.Y21 | length 3942.2
  Top Layer w8: v1(6248,3472.91) 6267.9,3492.8 U1.Y21@6267.9,3493.08
  Signal Layer 1 w4: J1.L4@4155,1005 J1.L4@4155,1014
  Signal Layer 3 w4: J1.L4@4155,1005 4155,1014 4061,1108 4061,1188.03 4111,1238.03 4111,2156 5442,3487 6233.91,3487 v1(6248,3472.91)
DATA5_LVDS25_N: J2.C6 U1.AA27 | length 2153.4
  Top Layer w8: v1@6209,3237.33 U1.AA27@6228.53,3256.86
  Top Layer w10: v1(6209,3237) v1@6209,3237.33
  Signal Layer 3 w4: J2.C6@6080,1165 6080,1611 6183,1714 6183,3211 v1(6209,3237)
DATA5_LVDS25_P: J2.C5 U1.AB28 | length 2025.1
  Top Layer w8: U1.AB28@6189.51,3217.49 v1(6209,3198)
  Top Layer w10: U1.AB28@6189.16,3217.49 U1.AB28@6189.51,3217.49
  Signal Layer 3 w4: J2.C5@6130,1265 6092,1303 6092,1606.03 6195,1709.03 6195,3184 v1(6209,3198)
DATA6_LVDS25_N: J2.F6 U1.F22 | length 2835.3
  Top Layer w8: U1.F22@6819.08,3453.71 v1@6838.79,3434
  Top Layer w10: v1@6838.79,3434 v1(6839,3434)
  Signal Layer 2 w4: v1(6839,3434) 6853,3448 7094,3448 7730,2812 J2.F6@7730,1165
DATA6_LVDS25_P: J2.F5 U1.G22 | length 2815.5
  Top Layer w8: U1.G22@6779.71,3453.71 v1@6799,3434.42
  Top Layer w10: v1(6799,3434) v1@6799,3434.42
  Signal Layer 2 w4: v1(6799,3434) 6825,3460 7098.97,3460 7742,2816.97 7742,1303 J2.F5@7780,1265
DATA7_LVDS25_N: J2.I3 U1.Y29 | length 2408.5
  Top Layer w8: v1(6248,3158) U1.Y29@6267.9,3177.9
  Top Layer w10: U1.Y29@6267.9,3177.9 U1.Y29@6267.9,3178.12
  Signal Layer 2 w4: J2.I3@6080,905 6080,1035.03 6024,1091.03 6024,1193 6074,1243 6074,1605 6261.5,1792.5 6261.5,3144.5 v1(6248,3158)
DATA7_LVDS25_P: J2.I4 U1.W29 | length 2326.3
  Top Layer w8: v1@6287.15,3158 U1.W29@6307.27,3178.12
  Top Layer w10: v1(6287,3158) v1@6287.15,3158
  Signal Layer 2 w4: J2.I4@6130,1005 6127,1005 6036,1096 6036,1188.03 6086,1238.03 6086,1600.03 6273.5,1787.53 6273.5,3144.5 v1(6287,3158)
DATA8_LVDS25_N: J2.L3 U1.G24 | length 3143.5
  Top Layer w8: U1.G24@6779.71,3374.97 v1@6799,3355.68
  Top Layer w10: v1(6799,3355) v1@6799,3355.68
  Signal Layer 3 w4: v1(6799,3355) 6812.5,3368.5 7173.5,3368.5 7724,2818 7724,1243 7674,1193 7674,1092 7730,1036 J2.L3@7730,905
DATA8_LVDS25_P: J2.L4 U1.G23 | length 3079.5
  Top Layer w8: U1.G23@6779.71,3414.34 v1@6799,3395.05
  Top Layer w10: v1(6799,3394) v1@6799,3395.05
  Signal Layer 3 w4: v1(6799,3394) 6812.5,3380.5 7178.47,3380.5 7736,2822.97 7736,1238.03 7686,1188.03 7686,1099 J2.L4@7780,1005
DATA9_LVDS25_N: J3.C6 U1.E30 | length 3898.6
  Top Layer w4: U1.E30@6858.45,3138.75 6866,3131.2 6866,3069.86 6923.86,3012 8197,3012 9705,1504 J3.C6@9705,1165
DATA9_LVDS25_P: J3.C5 U1.E29 | length 3858.7
  Top Layer w4: U1.E29@6858.45,3178.12 6858.45,3166.28 6876,3148.72 6876,3074 6928,3022 8201.14,3022 9715,1508.14 9715,1305 J3.C5@9755,1265
DATA10_LVDS25_N: J3.F6 U1.A21 | length 5531.7
  Top Layer w4: U1.A21@7015.93,3493.08 7030.61,3507.76 9381.24,3507.76 11355,1534 J3.F6@11355,1165
DATA10_LVDS25_P: J3.F5 U1.A20 | length 5464.9
  Top Layer w4: U1.A20@7015.93,3532.45 7030.61,3517.76 9385.38,3517.76 11365,1538.14 11365,1305 J3.F5@11405,1265
DATA11_LVDS25_N: J3.I3 U1.D26 | length 4206.7
  Top Layer w8: U1.D26@6897.82,3296.82 v1(6917,3316)
  Top Layer w10: U1.D26@6897.82,3296.23 U1.D26@6897.82,3296.82
  Signal Layer 1 w4: v1(6917,3316) 6943,3290 7919,3290 9699,1510 9699,1243 9649,1193 9649,1090.03 9705,1034.03 J3.I3@9705,905
DATA11_LVDS25_P: J3.I4 U1.C26 | length 4100
  Top Layer w8: U1.C26@6937.19,3296.23 v1(6957,3316)
  Signal Layer 1 w4: v1(6957,3316) 6971,3302 7923.97,3302 9711,1514.97 9711,1238.03 9661,1188.03 9661,1095 9751,1005 J3.I4@9755,1005
DATA12_LVDS25_N: J3.L3 U1.D18 | length 6042.4
  Top Layer w8: v1(6878,3591) 6878,3591.37 U1.D18@6897.82,3611.19
  Signal Layer 1 w4: v1(6878,3591) 6892,3605 9284,3605 11349,1540 11349,1243 11299,1193 11299,1093.03 11358.51,1033.51 11358.51,908.51 J3.L3@11355,905
DATA12_LVDS25_P: J3.L4 U1.D17 | length 5975.2
  Top Layer w8: v1(6878,3631) 6878.26,3631 U1.D17@6897.82,3650.56
  Signal Layer 1 w4: v1(6878,3631) 6892,3617 9288.97,3617 11361,1544.97 11361,1238.03 11311,1188.03 11311,1098 11404,1005 J3.L4@11405,1005
DELAY_EN_LVCMOS33: U1.H16 U7.B23 | length 4206.8
  Top Layer w8: v1(6721,3710) 6721,3709.27 U1.H16@6740.34,3689.93
  Top Layer w10: U7.B23@9991.71,5353 9993.71,5351 v1(10029,5351)
  Signal Layer 1 w4: v1(6721,3710) 6740,3729 6740,3990 6794,4044 7432,4044 8325,4937 9562,4937 9976,5351 v1(10029,5351)
DELAY_SCLK_LVCMOS33: U1.K16 U7.B25 | length 4375.4
  Top Layer w8: v1(6642,3710) 6661.6,3690.4 U1.K16@6661.6,3689.93
  Top Layer w10: U7.B25@9991.71,5453 9993.71,5451 v1(10029,5451)
  Signal Layer 1 w4: v1(6642,3710) 6662,3730 6662,4073 6712,4123 7419,4123 8298,5002 9517,5002 9966,5451 v1(10029,5451)
DELAY_SDIN_LVCMOS33: U1.L16 U7.B26 | length 4456.4
  Top Layer w8: v1(6602,3710) 6602.16,3710 U1.L16@6622.23,3689.93
  Top Layer w10: U7.B26@9991.71,5503 9993.71,5501 v1(10029,5501)
  Signal Layer 1 w4: v1(6602,3710) 6622,3730 6622,4107 6677,4162 7408,4162 8286,5040 9505,5040 9966,5501 v1(10029,5501)
DELAY_SLOAD_LVCMOS33: U1.J16 U7.B24 | length 4297.3
  Top Layer w8: v1(6680,3710) 6680.9,3710 U1.J16@6700.97,3689.93
  Top Layer w10: U7.B24@9991.71,5403 9993.71,5401 v1(10029,5401)
  Signal Layer 1 w4: v1(6680,3710) 6701,3731 6701,4039 6745,4083 7428,4083 8315,4970 9538,4970 9969,5401 v1(10029,5401)
FB1_LVDS25_N: J1.C8 U1.AJ27 | length 4612
  Top Layer w4: J1.C8@2355,1165 2359,1169 2359,1488.14 4103.93,3233.07 4106.86,3236 5892.71,3236 U1.AJ27@5913.57,3256.86
FB1_LVDS25_P: J1.C7 U1.AK28 | length 4464.2
  Top Layer w4: J1.C7@2405,1265 2369,1301 2369,1484 4111,3226 5864,3226 5870.51,3219.49 5872.2,3219.49 U1.AK28@5874.2,3217.49
FB2_LVDS25_N: J1.F8 U1.AA20 | length 3820.1
  Top Layer w8: v1(6209,3552) U1.AA20@6228.53,3532.45
  Signal Layer 2 w4: J1.F8@4005,1165 4007,1167 4007,2153.97 5431.03,3578 6183,3578 v1(6209,3552)
FB2_LVDS25_P: J1.F7 U1.AB20 | length 3669.9
  Top Layer w8: v1(6169,3552) 6169.61,3552 U1.AB20@6189.16,3532.45
  Signal Layer 2 w4: J1.F7@4055,1265 4019,1301 4019,2149 5436,3566 6155,3566 v1(6169,3552)
FB3_LVDS25_N: J1.I1 U1.AG24 | length 5105.7
  Top Layer w8: v1@5973.28,3394 U1.AG24@5992.31,3374.97
  Top Layer w10: v1(5972,3394) v1@5973.28,3394
  Signal Layer 1 w4: J1.I1@2355,905 2360,910 2360,1072.03 2282.51,1149.51 2279,1153.03 2279,1217 2282.51,1220.51 2349,1287 2349,1480.97 4288.03,3420 5946,3420 v1(5972,3394)
FB3_LVDS25_P: J1.I2 U1.AH24 | length 4955.4
  Top Layer w8: v1@5933.91,3394 U1.AH24@5952.94,3374.97
  Top Layer w10: v1(5933,3394) v1@5933.91,3394
  Signal Layer 1 w4: J1.I2@2405,1005 2401,1005 2372,1034 2372,1077 2291,1158 2291,1212.03 2361,1282.03 2361,1476 4293,3408 5919,3408 v1(5933,3394)
FB4_LVDS25_N: J1.L1 U1.AC21 | length 4089.3
  Top Layer w8: U1.AC21@6149.79,3493.08 6149.79,3493.79 v1(6169,3513)
  Signal Layer 1 w4: J1.L1@4005,905 J1.L1@4006,906
  Signal Layer 3 w4: J1.L1@4005,905 4006,906 4006,1074.03 3929,1151.03 3929,1205 3995,1271 3995,2141.97 5392.03,3539 6143,3539 v1(6169,3513)
FB4_LVDS25_P: J1.L2 U1.AC20 | length 3939
  Top Layer w8: v1(6130,3513) 6149.45,3532.45 U1.AC20@6149.79,3532.45
  Signal Layer 3 w4: J1.L2@4055,1005 4018,1042 4018,1079 3941,1156 3941,1200.03 4007,1266.03 4007,2137 5397,3527 6116,3527 v1(6130,3513)
FB5_LVDS25_N: J2.C8 U1.AE29 | length 2062.4
  Top Layer w8: v1(6051,3158) U1.AE29@6071.05,3178.05
  Top Layer w10: U1.AE29@6071.05,3178.05 U1.AE29@6071.05,3178.12
  Signal Layer 3 w4: J2.C8@5980,1165 5980,1684 6065,1769 6065,3144 v1(6051,3158)
FB5_LVDS25_P: J2.C7 U1.AD29 | length 1977.9
  Top Layer w8: v1(6091,3158) U1.AD29@6110.42,3177.42
  Top Layer w10: U1.AD29@6110.42,3177.42 U1.AD29@6110.42,3178.12
  Signal Layer 3 w4: J2.C7@6030,1265 5992,1303 5992,1679.03 6077,1764.03 6077,3144 v1(6091,3158)
FB6_LVDS25_N: J2.F8 U1.E24 | length 2677.5
  Top Layer w8: U1.E24@6858.97,3374.97 v1(6878,3394)
  Top Layer w10: U1.E24@6858.45,3374.97 U1.E24@6858.97,3374.97
  Signal Layer 2 w4: v1(6878,3394) 6880,3394 6905,3369 7090,3369 7630,2829 J2.F8@7630,1165
FB6_LVDS25_P: J2.F7 U1.D24 | length 2568.7
  Top Layer w8: U1.D24@6897.97,3374.97 v1(6917,3394)
  Top Layer w10: U1.D24@6897.82,3374.97 U1.D24@6897.97,3374.97
  Signal Layer 2 w4: v1(6917,3394) 6930,3381 7094.97,3381 7642,2833.97 7642,1303 J2.F7@7680,1265
FB7_LVDS25_N: J2.I1 U1.Y28 | length 2526.5
  Top Layer w8: v1@6248.39,3237 U1.Y28@6267.9,3217.49
  Top Layer w10: v1(6248,3237) v1@6248.39,3237
  Signal Layer 2 w4: J2.I1@5980,905 5980,1076.03 5913,1143.03 5913,1212 5971,1270 5971,1675 6223,1927 6223,3212 v1(6248,3237)
FB7_LVDS25_P: J2.I2 U1.AA28 | length 2397.8
  Top Layer w8: U1.AA28@6228.53,3217.49 v1(6248,3198)
  Signal Layer 2 w4: J2.I2@6030,1005 5992,1043 5992,1081 5925,1148 5925,1207.03 5983,1265.03 5983,1670.03 6235,1922.03 6235,3185 v1(6248,3198)
FB8_LVDS25_N: J2.L1 U1.H25 | length 3084
  Top Layer w8: U1.H25@6740.34,3335.6 v1@6759.94,3316
  Top Layer w10: v1@6759.94,3316 v1(6760,3316)
  Signal Layer 3 w4: v1(6760,3316) 6774,3330 7129,3330 7620,2839 7620,1263 7561,1204 7561,1145.03 7630,1076.03 7630,1052 J2.L1@7630,905
FB8_LVDS25_P: J2.L2 U1.H24 | length 3019.5
  Top Layer w8: U1.H24@6740.34,3374.97 v1@6760,3355.31
  Top Layer w10: v1(6760,3355) v1@6760,3355.31
  Signal Layer 3 w4: v1(6760,3355) 6773,3342 7133.97,3342 7632,2843.97 7632,1258.03 7573,1199.03 7573,1150 7642,1081 7642,1043 J2.L2@7680,1005
FB9_LVDS25_N: J3.C8 U1.G29 | length 3881.7
  Top Layer w4: U1.G29@6779.71,3178.12 6802,3155.83 6802,3045.86 6901.86,2946 8094,2946 9605,1435 J3.C8@9605,1165
FB9_LVDS25_P: J3.C7 U1.F30 | length 3753.5
  Top Layer w4: U1.F30@6819.08,3138.75 6811,3130.67 6811,3051 6906,2956 8098.14,2956 9615,1439.14 9615,1305 J3.C7@9655,1265
FB10_LVDS25_N: J3.F8 U1.A22 | length 5406
  Top Layer w4: U1.A22@7015.93,3453.71 7024.22,3462 9320,3462 11255,1527 J3.F8@11255,1165
FB10_LVDS25_P: J3.F7 U1.B22 | length 5382.7
  Top Layer w4: U1.B22@6976.56,3453.71 6988.4,3453.71 7006.69,3472 9324.14,3472 11265,1531.14 11265,1305 J3.F7@11305,1265
FB11_LVDS25_N: J3.I1 U1.D27 | length 4057.4
  Top Layer w8: U1.D27@6897.86,3256.86 v1(6917,3276)
  Signal Layer 1 w4: v1(6917,3276) 6942,3251 7789,3251 9595,1445 9595,1269 9535,1209 9535,1147.03 9605,1077.03 J3.I1@9605,905
FB11_LVDS25_P: J3.I2 U1.C27 | length 3948.7
  Top Layer w8: U1.C27@6937.86,3256.86 v1(6957,3276)
  Top Layer w10: U1.C27@6937.19,3256.86 U1.C27@6937.86,3256.86
  Signal Layer 1 w4: v1(6957,3276) 6970,3263 7793.97,3263 9607,1449.97 9607,1264.03 9547,1204.03 9547,1152 9617,1082 9617,1043 J3.I2@9655,1005
FB12_LVDS25_N: J3.L1 U1.C19 | length 5851.7
  Top Layer w8: U1.C19@6936.18,3571.82 U1.C19@6937.19,3571.82 6937.56,3571.82 v1(6956.74,3591)
  Signal Layer 1 w4: v1(6956.74,3591) 6981.74,3566 9216,3566 11246,1536 11246,1254 11188,1196 11188,1143.03 11255,1076.03 J3.L1@11255,905
FB12_LVDS25_P: J3.L2 U1.B19 | length 5742.4
  Top Layer w8: U1.B19@6976.18,3571.82 U1.B19@6976.56,3571.82 6976.97,3571.82 v1(6996.15,3591)
  Signal Layer 1 w4: v1(6996.15,3591) 7009.15,3578 9220.97,3578 11258,1540.97 11258,1249.03 11200,1191.03 11200,1148 11267,1081 11267,1043 J3.L2@11305,1005
FLASH_D0: R13.1 U1.P24 | length 1108.8
  Top Layer w8: U1.P24@6504.12,3374.97 v1@6523.15,3394
  Top Layer w10: v1(5708,3966) 5708,3993.41 R13.1@5708.59,3994 ; v1@6523.15,3394 v1(6523.87,3394)
  Signal Layer 2 w4: v1(5708,3966) 5837,3966 5938,3865 6053,3865 6129,3789 6129,3788.87 v1(6523.87,3394)
FLASH_D1: R14.2 U1.R25 | length 1613.6
  Top Layer w8: v1(5049,3694) R14.2@5081.41,3694 ; v1(6445,3355) U1.R25@6464.4,3335.6
  Top Layer w10: U1.R25@6464.4,3335.6 U1.R25@6464.75,3335.6
  Signal Layer 2 w4: v1(5049,3694) 5134,3609 6220,3609 6445,3384 v1(6445,3355)
FLASH_D2: R15.1 U1.R20 | length 862.3
  Top Layer w8: v1(6445,3552) 6445.2,3552 U1.R20@6464.75,3532.45
  Top Layer w10: R15.1@5707.59,3694 v1(5707.59,3721)
  Signal Layer 1 w4: v1(5707.59,3721) 5741.59,3687 6223,3687 6298,3612 6385,3612 v1(6445,3552)
FLASH_D3: R12.2 U1.R21 | length 1785.1
  Top Layer w8: v1(5010,4047) R12.2@5041.82,4047 ; v1(6445,3512) 6445.83,3512 U1.R21@6464.75,3493.08
  Signal Layer 1 w4: v1(5010,4047) 5010,3929 5330,3609 6232,3609 6329,3512 v1(6445,3512)
FLASH_nCS: R8.1 U1.U19 U2.7 | length 1331.2
  Top Layer w8: R8.1@5126.59,3743 5127.59,3744 U2.7@5213.13,3744 v1(5264,3744) ; v1(6366,3591) 6366.83,3591 U1.U19@6386.01,3571.82
  Signal Layer 1 w4: v1(5264,3744) 5360,3648 6223,3648 6280,3591 v1(6366,3591)
FPGA_CCLK: U1.B10 U2.16 | length 1460.9
  Top Layer w8: v1(6957,3946) 6957,3945.71 U1.B10@6976.56,3926.15
  Top Layer w10: U2.16@5581.24,4044 v1(5632,4044)
  Signal Layer 4 w4: v1(5632,4044) 5920,4044 6038,3926 6937,3926 v1(6957,3946)
FTCK1_LVDS25_N: J1.A2 U1.AJ26 | length 5462
  Top Layer w4: J1.A2@1555,1165 1559,1169 1559,1519.14 3354.86,3315 5882.95,3315 5901.72,3296.23 U1.AJ26@5913.57,3296.23
FTCK1_LVDS25_P: J1.A1 U1.AK26 | length 5315.2
  Top Layer w4: J1.A1@1605,1265 1569,1301 1569,1515 3359,3305 5865.43,3305 U1.AK26@5874.2,3296.23
FTCK2_LVDS25_N: J1.D2 U1.AE28 | length 3925.3
  Top Layer w8: v1@6051.56,3198 U1.AE28@6071.05,3217.49
  Top Layer w10: v1(6051,3198) v1@6051.56,3198
  Signal Layer 1 w4: J1.D2@3205,1165 3233,1165 3302,1234 3302,1432 4806,2936 5947.97,2936 6037.5,3025.53 6037.5,3184.5 v1(6051,3198)
FTCK2_LVDS25_P: J1.D1 U1.AF28 | length 3782.9
  Top Layer w8: v1@6012.19,3198 U1.AF28@6031.68,3217.49
  Top Layer w10: v1(6012,3198) v1@6012.19,3198
  Signal Layer 1 w4: J1.D1@3255,1265 3290,1300 3290,1436.97 4801.03,2948 5943,2948 6025.5,3030.5 6025.5,3184.5 v1(6012,3198)
FTCK3_LVDS25_N: J1.G7 U1.AJ22 | length 5835.7
  Top Layer w8: v1(5894,3473) U1.AJ22@5913.29,3453.71
  Top Layer w10: U1.AJ22@5913.29,3453.71 U1.AJ22@5913.57,3453.71
  Signal Layer 1 w4: J1.G7@1555,905 1555,1039.03 1499,1095.03 1499,1193 1549,1243 1549,1511.97 3496.53,3459.5 5880.5,3459.5 v1(5894,3473)
FTCK3_LVDS25_P: J1.G8 U1.AJ23 | length 5731.8
  Top Layer w8: v1(5894,3434) U1.AJ23@5913.57,3414.43
  Top Layer w10: U1.AJ23@5913.57,3414.34 U1.AJ23@5913.57,3414.43
  Signal Layer 1 w4: J1.G8@1605,1005 1605,1006 1560,1051 1511,1100 1511,1188.03 1561,1238.03 1561,1507 3501.5,3447.5 5880.5,3447.5 v1(5894,3434)
FTCK4_LVDS25_N: J1.J7 U1.AH29 | length 4138.2
  Top Layer w8: v1(5933,3158) U1.AH29@5952.94,3177.94
  Top Layer w10: U1.AH29@5952.94,3177.94 U1.AH29@5952.94,3178.12
  Signal Layer 1 w4: J1.J7@3205,905 3205,1035.03 3149,1091.03 3149,1193.97 3199,1243.97 3199,1470.97 3202.51,1474.49 4769.03,3041 5911.5,3041 5946.5,3076 5946.5,3144.5 v1(5933,3158)
FTCK4_LVDS25_P: J1.J8 U1.AG29 | length 4055.9
  Top Layer w8: v1@5972.19,3158 U1.AG29@5992.31,3178.12
  Top Layer w10: v1(5972,3158) v1@5972.19,3158
  Signal Layer 1 w4: J1.J8@3255,1005 3252,1005 3161,1096 3161,1189 3211,1239 3211,1466 4774,3029 5916.47,3029 5958.5,3071.03 5958.5,3144.5 v1(5972,3158)
FTCK5_LVDS25_N: J2.A2 U1.AB25 | length 2782.2
  Top Layer w8: v1(6169,3316) U1.AB25@6188.6,3335.6
  Top Layer w10: U1.AB25@6188.6,3335.6 U1.AB25@6189.16,3335.6
  Signal Layer 2 w4: J2.A2@5180,1165 5180,2656.97 5825.03,3302 6155,3302 v1(6169,3316)
FTCK5_LVDS25_P: J2.A1 U1.AA25 | length 2722.5
  Top Layer w8: v1(6209,3316) U1.AA25@6228.53,3335.53
  Top Layer w10: U1.AA25@6228.53,3335.53 U1.AA25@6228.53,3335.6
  Signal Layer 2 w4: J2.A1@5230,1265 5192,1303 5192,2652 5830,3290 6183,3290 v1(6209,3316)
FTCK6_LVDS25_N: J2.D2 U1.C29 | length 2124.9
  Top Layer w8: U1.C29@6937.19,3178.12 v1@6957,3197.93
  Top Layer w10: v1@6957,3197.93 v1(6957,3198)
  Signal Layer 2 w4: J2.D2@6830,1165 6830,1453 6970.5,1593.5 6970.5,3184.5 v1(6957,3198)
FTCK6_LVDS25_P: J2.D1 U1.B29 | length 2040.5
  Top Layer w8: U1.B29@6976.56,3178.12 v1@6996,3197.56
  Top Layer w10: v1@6996,3197.56 v1(6996,3198)
  Signal Layer 2 w4: J2.D1@6880,1265 6842,1303 6842,1448.03 6982.5,1588.53 6982.5,3184.5 v1(6996,3198)
FTCK7_LVDS25_N: J2.G7 U1.AD26 | length 2902
  Top Layer w10: v1(6091,3276) 6110.42,3295.42 U1.AD26@6110.42,3296.23
  Signal Layer 2 w4: J2.G7@5180,905 5180,1021 5275,1116 5275,2673.97 5864.03,3263 6078,3263 v1(6091,3276)
FTCK7_LVDS25_P: J2.G8 U1.AC26 | length 2811.9
  Top Layer w8: v1(6130,3276) U1.AC26@6149.79,3295.79
  Top Layer w10: U1.AC26@6149.79,3295.79 U1.AC26@6149.79,3296.23
  Signal Layer 2 w4: J2.G8@5229,1005 J2.G8@5230,1005 5229.49,1005.51 5229.49,1053.51 5287,1111.03 5287,2669 5869,3251 6105,3251 v1(6130,3276)
FTCK8_LVDS25_N: J2.J7 U1.E28 | length 2421.7
  Top Layer w8: U1.E28@6858.51,3217.49 v1(6878,3198)
  Top Layer w10: U1.E28@6858.45,3217.49 U1.E28@6858.51,3217.49
  Signal Layer 3 w4: J2.J7@6830,905 6830,1037 6774,1093 6774,1193 6824,1243 6824,1447 6920,1543 6920,3156 v1(6878,3198)
FTCK8_LVDS25_P: J2.J8 U1.D28 | length 2326.1
  Top Layer w8: U1.D28@6897.82,3217.49 v1@6917,3198.31
  Top Layer w10: v1(6917,3198) v1@6917,3198.31
  Signal Layer 3 w4: J2.J8@6880,1005 6786,1099 6786,1188.03 6836,1238.03 6836,1442.03 6932,1538.03 6932,3162 6917,3177 v1(6917,3198)
FTCK9_LVDS25_N: J3.A2 U1.F17 | length 3772.5
  Top Layer w8: U1.F17@6819.08,3650.56 6819.56,3650.56 v1(6839,3670)
  Signal Layer 2 w4: v1(6839,3670) 6853,3684 7531,3684 8805,2410 J3.A2@8805,1165
FTCK9_LVDS25_P: J3.A1 U1.G17 | length 3752.5
  Top Layer w8: U1.G17@6779.71,3650.56 6779.71,3650.71 v1(6799,3670)
  Signal Layer 2 w4: v1(6799,3670) 6825,3696 7535.97,3696 8817,2414.97 8817,1303 J3.A1@8855,1265
FTCK10_LVDS25_N: J3.D2 U1.A23 | length 4592.1
  Top Layer w4: U1.A23@7015.93,3414.34 7023.59,3422 8565,3422 10455,1532 J3.D2@10455,1165
FTCK10_LVDS25_P: J3.D1 U1.B23 | length 4568.8
  Top Layer w4: U1.B23@6976.56,3414.34 6988.4,3414.34 7006.06,3432 8569.14,3432 10465,1536.14 10465,1305 J3.D1@10505,1265
FTCK11_LVDS25_N: J3.G7 U1.H17 | length 4152.6
  Top Layer w8: U1.H17@6740.34,3650.56 6740.56,3650.56 v1(6760,3670)
  Signal Layer 3 w4: v1(6760,3670) 6774,3684 7531,3684 8799,2416 8799,1245 8749,1195 8749,1093 8805,1037 J3.G7@8805,905
FTCK11_LVDS25_P: J3.G8 U1.J17 | length 4132.6
  Top Layer w8: U1.J17@6700.97,3650.56 6701.56,3650.56 v1(6721,3670)
  Signal Layer 3 w4: v1(6721,3670) 6747,3696 7535.97,3696 8811,2420.97 8811,1240.03 8761,1190.03 8761,1099 J3.G8@8855,1005
FTCK12_LVDS25_N: J3.J7 U1.C20 | length 5031
  Top Layer w8: U1.C20@6937.19,3532.45 6956.74,3552 v1(6957,3552)
  Signal Layer 1 w4: v1(6957,3552) 6982,3527 8460,3527 10449,1538 10449,1243 10399,1193 10399,1089.03 10455,1033.03 J3.J7@10455,905
FTCK12_LVDS25_P: J3.J8 U1.B20 | length 4925.3
  Top Layer w8: U1.B20@6976.56,3532.45 6976.56,3532.56 v1(6996,3552)
  Signal Layer 1 w4: v1(6996,3552) 7009,3539 8464.97,3539 10461,1542.97 10461,1238.03 10411,1188.03 10411,1094 10500,1005 J3.J8@10505,1005
FTDI1_LVDS25_N: J1.A4 U1.AJ24 | length 5576.1
  Top Layer w4: J1.A4@1455,1165 1460,1170 1460,1515.14 3296.93,3352.07 3299.86,3355 5893.6,3355 U1.AJ24@5913.57,3374.97
FTDI1_LVDS25_P: J1.A3 U1.AK25 | length 5428.3
  Top Layer w4: J1.A3@1505,1265 1470,1300 1470,1511 3304,3345 5864,3345 5871.4,3337.6 5872.2,3337.6 U1.AK25@5874.2,3335.6
FTDI2_LVDS25_N: J1.D4 U1.AA30 | length 4272.7
  Top Layer w4: J1.D4@3105,1165 3112,1172 3112,1506.14 4434.86,2829 6130,2829 6243.21,2942.21 6243.21,3124.06 U1.AA30@6228.53,3138.75
FTDI2_LVDS25_P: J1.D3 U1.Y30 | length 4183.5
  Top Layer w4: J1.D3@3155,1265 3122,1298 3122,1502 4439,2819 6134.14,2819 6253.21,2938.07 6253.21,3124.06 U1.Y30@6267.9,3138.75